# Altium PCB Float_Receiver_PCB.PcbDoc
Units mm, origin at the board's own origin, x right, y up, seen from the top; angles counter-clockwise.
Board outline 77 x 42 mm, 2 copper layers (Top Layer, Bottom Layer); 43 components, 31 nets, 178 pads, 57 vias.
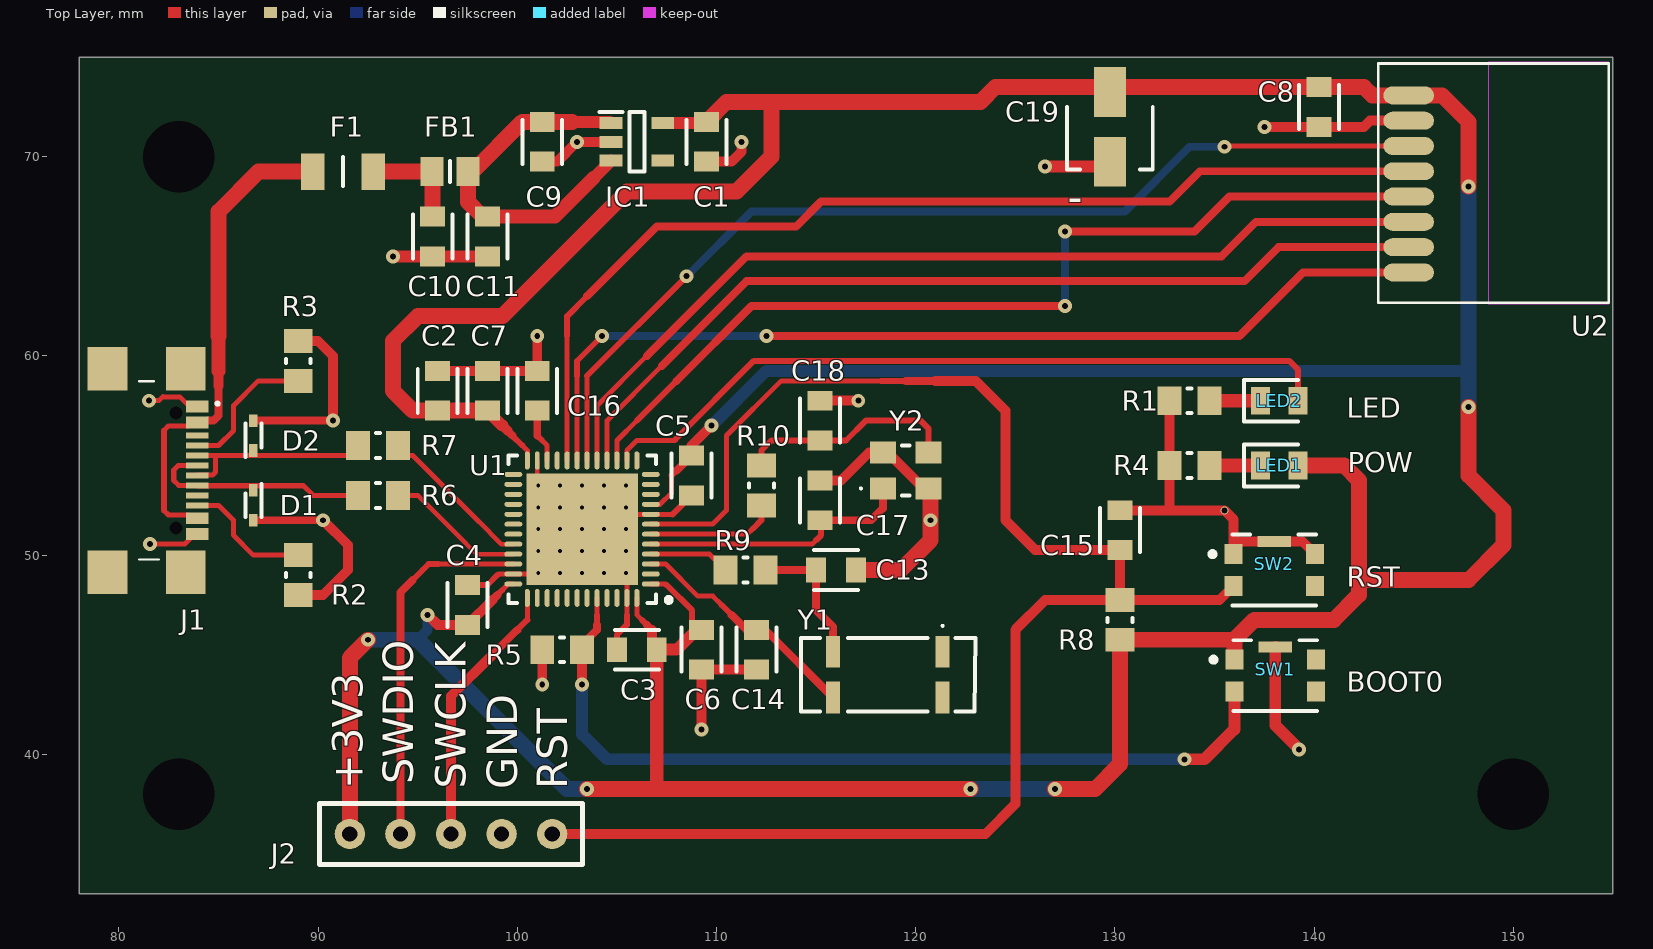
[diagram p0: Top Layer view]
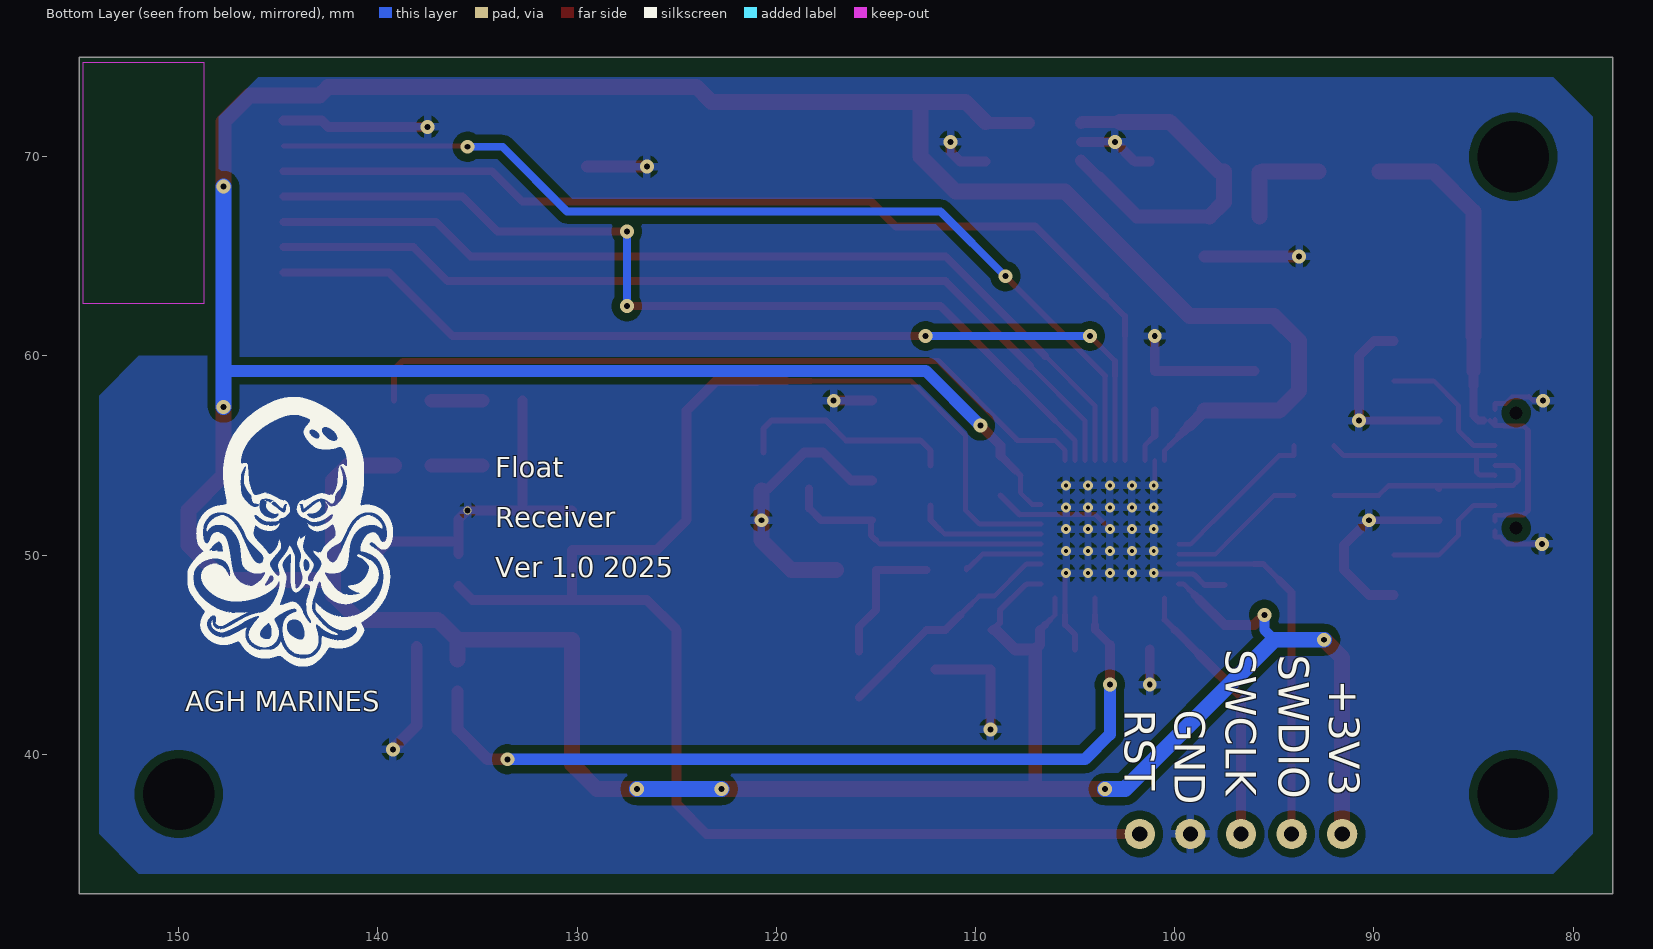
[diagram p1: Bottom Layer view, seen from below]
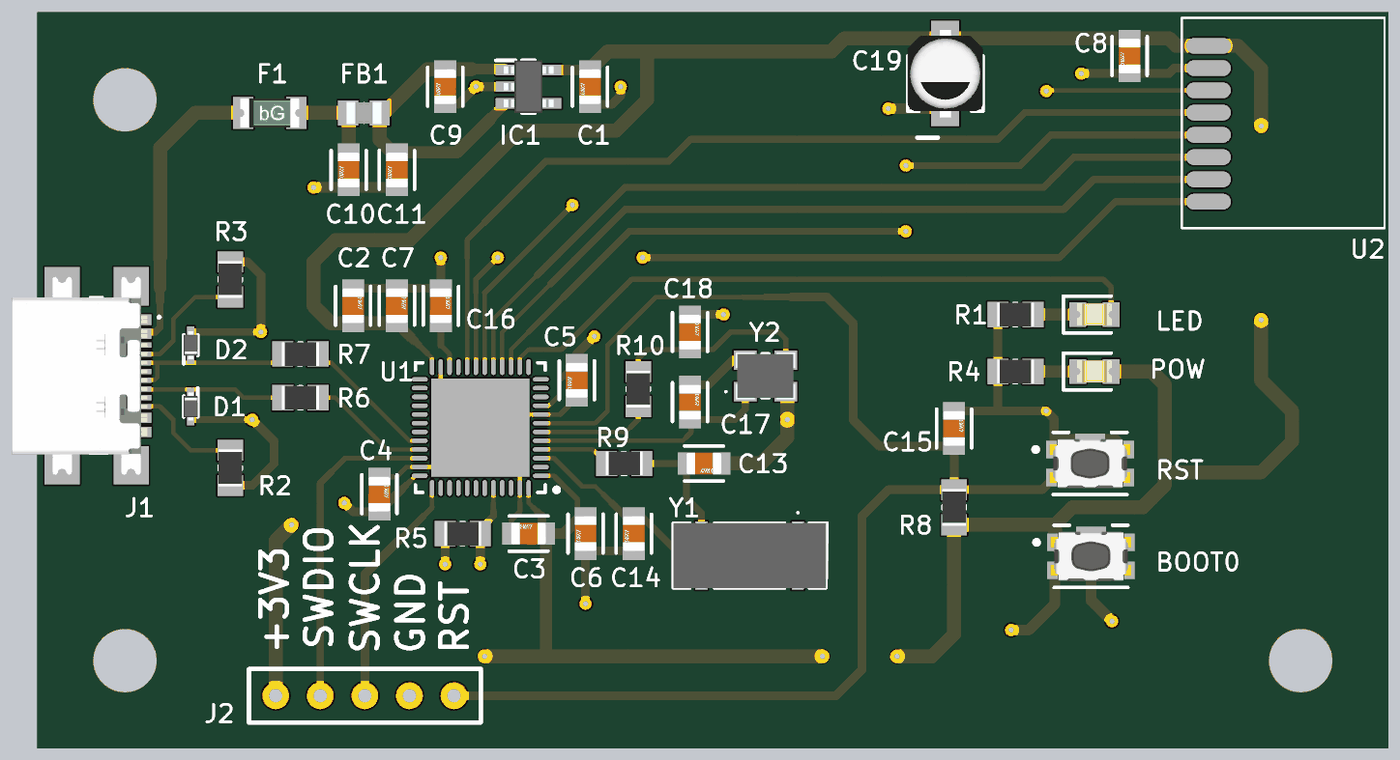
[diagram p2: 3D render of the assembled board from above, using the file's embedded part models]

## Layer stack, top to bottom
Top Solder: solder mask 0.0102, Solder Resist, Dk 3.5
Top Layer: signal copper 0.0356
Dielectric 1: dielectric 0.32, FR-4, Dk 4.8
Bottom Layer: signal copper 0.0356
Bottom Solder: solder mask 0.0102, Solder Resist, Dk 3.5

## Board outline
78,33 78,75 155,75 155,33

## Design rules (kind name [scope] priority, off if disabled: settings)
Clearance [All] p1: gap=0.4 ignorepadtopadclearanceinfootprint=TRUE except(0.203: Arc-Arc Arc-Track Arc-SMDPad Arc-THPad Arc-Via Arc-Text Arc-Hole Track-Track Track-SMDPad Track-THPad Track-Via Track-Text Track-Hole SMDPad-SMDPad SMDPad-THPad SMDPad-Via SMDPad-Text SMDPad-Hole THPad-THPad THPad-Via THPad-Text THPad-Hole Via-Via Via-Text Via-Hole Text-Text Text-Hole)
DiffPairsRouting [All] p1: maxlimit=0.254 minlimit=0.127 mostfreqgap=0.203 toplayer_minwidth=0.229 toplayer_maxwidth=0.381 toplayer_prefwidth=0.254 bottomlayer_minwidth=0.229 bottomlayer_maxwidth=0.381 bottomlayer_prefwidth=0.254 maxuncoupledlength=12.7
HoleSize [All] p1: absolutevalues=TRUE maxlimit=5 minlimit=0.025 maxpercent=80.000 minpercent=20.000
MinimumSolderMaskSliver [All] p1: minsoldermaskwidth=0.01
PlaneClearance [All] p1: clearance=0.4
PlaneConnect [All] p1: planeconnectstyle=Relief reliefexpansion=0.508 reliefentries=4 reliefconductorwidth=0.3 reliefairgap=0.254
PolygonConnect [All] p1: connectstyle=Relief reliefconductorwidth=0.4 reliefentries=4 polygonreliefangle="90 Angle" airgapwidth=0.23
RoutingVias [All] p1: holewidth=0.3 width=0.7 viastyle="Through Hole" minholewidth=0.25 minwidth=0.55 maxholewidth=0.4 maxwidth=0.9
SilkToSilkClearance [All] p1: silktosilkclearance=0.1
SilkToSolderMaskClearance [IsPad] p1: minsilkscreentomaskgap=0.01 clearancetoexposedcopper=TRUE
SolderMaskExpansion [All] p1: expansion=0.102 istentingtop=FALSE
SupplyNets "Schematic Supply Nets_2" [InNet('+5')] p1: voltage=0.000
SupplyNets "Schematic Supply Nets_1" [InNet('GND')] p2: voltage=0.000
SupplyNets "Schematic Supply Nets" [InNet('+3V3')] p3: voltage=0.000
UnRoutedNet [All] p1: checkbadconnections=TRUE
Width [All] p1: maxlimit=1 minlimit=0.2 preferedwidth=0.279 minimp=50.000000 maximp=50.000000 favimp=50.000000
22 further rules are at their usual default settings.

## Classes and differential pairs
differential pair USB_D: +USB_D_P -USB_D_N
differential pair USB: +USB_P -USB_N

## Components (designator, comment, footprint, x,y, rotation, side; value= is the part's Value field where it differs from the comment)
C1 "1u" FP-0805-L_2_01_0_2-W_1_25-MFG 109.5,70.75 r270 top
C2 "100n" FP-0805-L_2_01_0_2-W_1_25-MFG 96,58.25 r90 top
C3 "2.2u" FP-0805-L_2_01_0_2-W_1_25-MFG 106,45.25 r180 top
C4 "100n" FP-0805-L_2_01_0_2-W_1_25-MFG 97.5,47.5 r90 top
C5 "100n" FP-0805-L_2_01_0_2-W_1_25-MFG 108.75,54 r270 top
C6 "100n" FP-0805-L_2_01_0_2-W_1_25-MFG 109.25,45.25 r270 top
C7 "100n" FP-0805-L_2_01_0_2-W_1_25-MFG 98.5,58.25 r90 top
C8 "100n" FP-0805-L_2_01_0_2-W_1_25-MFG 140.25,72.5 r270 top
C9 "1u" FP-0805-L_2_01_0_2-W_1_25-MFG 101.25,70.75 r270 top
C10 "2.2u" FP-0805-L_2_01_0_2-W_1_25-MFG 95.75,66 r270 top
C11 "2.2u" FP-0805-L_2_01_0_2-W_1_25-MFG 98.5,66 r270 top
C13 "15p" FP-0805-L_2_01_0_2-W_1_25-MFG 116,49.25 r0 top
C14 "15p" FP-0805-L_2_01_0_2-W_1_25-MFG 112,45.25 r270 top
C15 "100n" FP-0805-L_2_01_0_2-W_1_25-MFG 130.25,51.25 r90 top
C16 "2.2u" FP-0805-L_2_01_0_2-W_1_25-MFG 101,58.25 r90 top
C17 "8p" FP-0805-L_2_01_0_2-W_1_25-MFG 115.2,52.75 r90 top
C18 "8p" FP-0805-L_2_01_0_2-W_1_25-MFG 115.2,56.75 r90 top
C19 "10uF" EEE1AA220WR 129.75,71.5 r270 top
D1 "ESD5Z5.0T1G" SODFL1608X70N 86.75,52.5 r270 top
D2 "ESD5Z5.0T1G" SODFL1608X70N 86.75,56 r90 top
F1 "500mA" FUSC3216X75N 91.25,69.25 r0 top
FB1 "BLM21PG221SN1D" BEADC2012X105N 96.619,69.25 r0 top
IC1 "AP2112K-3.3TRG1" SOT95P285X140-5N 106,70.75 r0 top
J1 "USB4110-GF-A" USB4110GFA 80.25,54.25 r270 top
J2 "ST-LINK" goldpin5 96.67,36 r0 top
LED1 "RED LED" LEDC2012X80N 138.25,54.5 r0 top
LED2 "GREEN LED" LEDC2012X80N 138.25,57.75 r0 top
R1 "270R" RESC2013X60X35ML10T20 133.75,57.75 r0 top
R2 "5k1" RESC2013X60X35ML10T20 89,49 r90 top
R3 "5k1" RESC2013X60X35ML10T20 89,59.75 r270 top
R4 "330R" RESC2013X60X35ML10T20 133.75,54.5 r0 top
R5 "10k" RESC2013X60X35ML10T20 102.25,45.25 r180 top
R6 "22R" RESC2013X60X35ML10T20 93,53 r180 top
R7 "22R" RESC2013X60X35ML10T20 93,55.5 r180 top
R8 "10k" RESC2013X60X35ML10T20 130.25,46.75 r270 top
R9 "0R" RESC2013X60X35ML10T20 111.45,49.25 r180 top
R10 "0R" RESC2013X60X35ML10T20 112.25,53.5 r90 top
SW1 "KMR221GLFS" FP-KMR221GLFS-MFG 138.05,43.95 r0 top
SW2 "KMR221GLFS" FP-KMR221GLFS-MFG 138,49.25 r0 top
U1 "STM32F401CCU6" STM-UFQFPN48_N 103.25,51.3 r180 top
U2 "NRF24L01+ SMD" PCBComponent_1 145.004,73.918 r270 top
Y1 "LFXTAL003000REEL" LFXTAL003000REEL 118.6,44 r180 top
Y2 "3225-25M-SR" 322525MSR 119.5,54.25 r0 top

## Footprints (in the part's own frame and the unit in brackets; to place one, negate y for a bottom-side part, rotate by r counter-clockwise, add the part's x,y. Pads: shape width x height; smd on the part's side, far side on the other; paste and mask are expansions set on the pad)
322525MSR [mm]
  rect 1.3x1.1 smd: 1(-1.15,-0.9) 2(1.15,-0.9) 3(1.15,0.9) 4(-1.15,0.9)
  silkscreen extent -2.3,-1.25 0.2,1.25, body extent -1.69,-1.34 1.69,1.34, height 0.8
BEADC2012X105N [mm]
  rect 1.15x1.45 smd: 1(-0.9,0) 2(0.9,0)
  silkscreen extent 0,-0.53 0,0.53, body extent -1,-0.63 1,0.63, height 1.05
EEE1AA220WR [mm]
  rect 2.5x1.6 smd: 1(-1.75,0) 2(1.75,0)
  silkscreen extent -1,-2.15 2.15,2.15, body extent -2.5,-2.15 2.5,2.15, height 5.78
FP-0805-L_2_01_0_2-W_1_25-MFG [mm]
  rect 1x1.25 smd paste+0 mask+0: 1(-1,0) 2(1,0)
  silkscreen extent -1.1,-1 1.1,1, body extent -1.6,-0.82 1.6,0.82, height 0.25
FP-KMR221GLFS-MFG [mm]
  rect 0.9x1 smd paste+0 mask+0: 1(-2.05,0.8) 2(2.05,0.8) 3(-2.05,-0.8) 4(2.05,-0.8)
  rect 1.7x0.55 smd paste+0 mask+0: 5(0,1.425)
  silkscreen extent -3.22,-1.78 2.1,1.78, body extent -2.6,-1.5 2.6,1.8, height 0.25
FUSC3216X75N [mm]
  rect 1.17x1.82 smd: 1(-1.52,0) 2(1.52,0)
  silkscreen extent 0,-0.72 0,0.72, body extent -1.68,-0.82 1.68,0.82, height 0.6
goldpin5 [mil]
  round 60 hole 30: 1(-200,0) 2(-100,0) 3(0,0) 4(100,0) 5(200,0)
  silkscreen extent -260,-60 260,60
LEDC2012X80N [mm]
  rect 0.95x1.4 smd: 1(-0.95,0) 2(0.95,0)
  silkscreen extent -1.78,-1.05 0.95,1.05, body extent -1,-0.63 1,0.63, height 0.8
LFXTAL003000REEL [mm]
  rect 0.7x1.6 smd: 1(-2.75,-1.15) 2(2.75,-1.15) 3(2.75,1.15) 4(-2.75,1.15)
  silkscreen extent -4.4,-2.5 4.35,1.85, body extent -4.35,-1.88 4.35,1.88, height 2.6
PCBComponent_1 [mm]
  oval 0.9x2.54 smd: 1(0.838,-0.254) 2(2.108,-0.254) 3(3.378,-0.254) 4(4.648,-0.254) 5(5.918,-0.254) 6(7.188,-0.254) 7(8.458,-0.254) 8(9.728,-0.254)
  Keep-Out Layer region: -0.832,3.746 11.303,3.746 11.303,9.779 -0.832,9.779
  silkscreen extent -0.76,-1.78 11.24,9.78
RESC2013X60X35ML10T20 [mm] "Chip Resistor, 2-Leads, Body 2.1x1.35mm, IPC Low Density"
  rect 1.2x1.45 smd: 1(-1,0) 2(1,0)
  silkscreen extent -0.1,-0.63 0.1,0.63, body extent -1.05,-0.68 1.05,0.67, height 0.6
SODFL1608X70N [mm]
  rect 0.64x0.42 smd: 1(-0.75,0) 2(0.75,0)
  silkscreen extent -1.07,-0.4 0.6,0.4, body extent -0.8,-0.4 0.8,0.4, height 0.7
SOT95P285X140-5N [mm]
  rect 1.15x0.6 smd: 1(-1.3,0.95) 2(-1.3,0) 3(-1.3,-0.95) 4(1.3,-0.95) 5(1.3,0.95)
  silkscreen extent -1.88,-1.5 0.38,1.5, body extent -1.43,-1.5 1.43,1.5, height 1.4
STM-UFQFPN48_N [mm] "QFN, 48-Leads, Body 7.1x7.1mm, Pitch 0.5mm, Thermal Pad 5.6x5.6mm, IPC Medium Density"
  oval 0.9x0.25 smd: 1(-3.45,2.75) 2(-3.45,2.25) 3(-3.45,1.75) 4(-3.45,1.25) 5(-3.45,0.75) 6(-3.45,0.25) 7(-3.45,-0.25) 8(-3.45,-0.75) 9(-3.45,-1.25) 10(-3.45,-1.75) 11(-3.45,-2.25) 12(-3.45,-2.75) 25(3.45,-2.75) 26(3.45,-2.25) 27(3.45,-1.75) 28(3.45,-1.25) 29(3.45,-0.75) 30(3.45,-0.25) 31(3.45,0.25) 32(3.45,0.75) 33(3.45,1.25) 34(3.45,1.75) 35(3.45,2.25) 36(3.45,2.75)
  oval 0.25x0.9 smd: 13(-2.75,-3.45) 14(-2.25,-3.45) 15(-1.75,-3.45) 16(-1.25,-3.45) 17(-0.75,-3.45) 18(-0.25,-3.45) 19(0.25,-3.45) 20(0.75,-3.45) 21(1.25,-3.45) 22(1.75,-3.45) 23(2.25,-3.45) 24(2.75,-3.45) 37(2.75,3.45) 38(2.25,3.45) 39(1.75,3.45) 40(1.25,3.45) 41(0.75,3.45) 42(0.25,3.45) 43(-0.25,3.45) 44(-0.75,3.45) 45(-1.25,3.45) 46(-1.75,3.45) 47(-2.25,3.45) 48(-2.75,3.45)
  rect 5.6x5.6 smd: 49(0,0)
  silkscreen extent -4.48,-3.7 3.7,3.7, body extent -3.55,-3.55 3.55,3.55, height 0.6
USB4110GFA [mm]
  rect 0.3x1.15 smd: A1(-3.35,3.678) A4(-2.55,3.678) A5(-1.25,3.678) A6(-0.25,3.678) A7(0.25,3.678) A8(1.25,3.678) A9(2.55,3.678) A12(3.35,3.678) B1(3.05,3.678) B4(2.25,3.678) B5(1.75,3.678) B6(0.75,3.678) B7(-0.75,3.678) B8(-1.75,3.678) B9(-2.25,3.678) B12(-3.05,3.678)
  round 0.325 hole 0.65 unplated: MH1(-2.89,2.603) MH2(2.89,2.603)
  rect 2.18x2 smd: MP1(-5.11,-0.827) MP2(5.11,-0.827) MP3(-5.11,3.103) MP4(5.11,3.103)
  silkscreen extent -4.5,0.75 4.47,4.75, body extent -5.65,-3.68 5.65,4.02, height 3.26

## Part data
C1 C9 C13 C14 C16 C17 C18: library part CMP-1036-04738-3, Capacitance=100n, Case Code (Imperial)=0805, Case Code (Metric)=2012, Dielectric=X7R, Insulation Resistance=100GR, Max Operating Temperature=125°C, Min Operating Temperature=-55°C, Package Quantity=1, Tolerance=10%, Voltage=10V, Case/Package=0805, Construction=Flat, Contact Plating=Tin, Depth=1.25mm, Dissipation Factor=5%, Height=1.4mm, Lead Free="Lead Free", Length=2.01mm, Mount="Surface Mount", Number of Pins=2, Packaging="Tape and Reel", Radiation Hardening=No, REACH SVHC="No SVHC", RoHS Compliant=Yes, Series=-, Size=1.4mm, Termination=SMD/SMT, Thickness=0.055inch, Voltage Rating=10V, Voltage Rating (DC)=10V, Width=1.25mm
C2 C3 C4 C5 C6 C7 C8 C10 C11 C15: library part CMP-1036-04738-3, Case Code (Imperial)=0805, Case Code (Metric)=2012, Dielectric=X7R, Insulation Resistance=100GR, Max Operating Temperature=125°C, Min Operating Temperature=-55°C, Package Quantity=1, Tolerance=10%, Voltage=10V, Case/Package=0805, Construction=Flat, Contact Plating=Tin, Depth=1.25mm, Dissipation Factor=5%, Height=1.4mm, Lead Free="Lead Free", Length=2.01mm, Mount="Surface Mount", Number of Pins=2, Packaging="Tape and Reel", Radiation Hardening=No, REACH SVHC="No SVHC", RoHS Compliant=Yes, Series=-, Size=1.4mm, Termination=SMD/SMT, Thickness=0.055inch, Voltage Rating=10V, Voltage Rating (DC)=10V, Width=1.25mm
  C2 C4 C5 C6 C7 C8 C15: Capacitance=100n
  C3 C10 C11: Capacitance=2.2u
C19: library part EEE1CA100SR, "Capacitor Polarised", Manufacturer_Name=Panasonic, Arrow Part Number=EEE1CA100SR, Arrow Price/Stock=https://www.arrow.com/en/products/eee-1ca100sr/panasonic, Datasheet Link=http://industrial.panasonic.com/cdbs/www-data/pdf/RDE0000/ABA0000C1145.pdf, Height=5.5mm, Manufacturer_Part_Number=EEE1CA100SR
D1 D2: "Diode", Manufacturer_Name=onsemi, Mouser Part Number=863-ESD5Z5.0T1G, Arrow Part Number=ESD5Z5.0T1G, Arrow Price/Stock=https://www.arrow.com/en/products/esd5z5.0t1g/on-semiconductor?utm_currency=USD&region=nac, Datasheet Link=https://www.onsemi.com/pub/Collateral/ESD5Z2.5T1-D.PDF, Height=0.7mm, Manufacturer_Part_Number=ESD5Z5.0T1G, Mouser Price/Stock=https://www.mouser.co.uk/ProductDetail/onsemi/ESD5Z5.0T1G?qs=OSf9jACorvYw3fDx1S8P6A%3D%3D
F1: library part 0ZCJ0025FF2E, "Fuse", Manufacturer_Name="Bel Circuit Protection", Arrow Part Number=0ZCJ0025FF2E, Arrow Price/Stock=https://www.arrow.com/en/products/0zcj0025ff2e/bel-group?region=nac, Datasheet Link=https://componentsearchengine.com/Datasheets/2/0ZCJ0025FF2E.pdf, Height=0.75mm, Manufacturer_Part_Number=0ZCJ0025FF2E
FB1: "Ferrite Bead", Manufacturer_Name="Murata Electronics", Mouser Part Number=81-BLM21P221SG, Arrow Part Number=BLM21PG221SN1D, Arrow Price/Stock=https://www.arrow.com/en/products/blm21pg221sn1d/murata-manufacturing?utm_currency=USD&region=europe, Datasheet Link=https://datasheet.datasheetarchive.com/originals/dk/DKDS-31/605570.pdf, Height=1.05mm, Manufacturer_Part_Number=BLM21PG221SN1D, Mouser Price/Stock=https://www.mouser.co.uk/ProductDetail/Murata-Electronics/BLM21PG221SN1D?qs=N%2FLoXOA9PTJ4i6RHFrsqmw%3D%3D
IC1: "Integrated Circuit", Manufacturer_Name="Diodes Incorporated", Mouser Part Number=621-AP2112K-3.3TRG1, Arrow Part Number=AP2112K-3.3TRG1, Arrow Price/Stock=https://www.arrow.com/en/products/ap2112k-3.3trg1/diodes-incorporated?utm_currency=USD&region=nac, Datasheet Link=https://www.diodes.com//assets/Datasheets/AP2112.pdf, Height=1.4mm, Manufacturer_Part_Number=AP2112K-3.3TRG1, Mouser Price/Stock=https://www.mouser.co.uk/ProductDetail/Diodes-Incorporated/AP2112K-3.3TRG1?qs=x6A8l6qLYDDPYHosCdzh%2FA%3D%3D
J1: "Connector", Manufacturer_Name="GCT (GLOBAL CONNECTOR TECHNOLOGY)", Mouser Part Number=640-USB4110-GF-A, Datasheet Link=https://gct.co/files/drawings/usb4110.pdf, Height=3.26mm, Manufacturer_Part_Number=USB4110-GF-A, Mouser Price/Stock=https://www.mouser.co.uk/ProductDetail/GCT/USB4110-GF-A?qs=KUoIvG%2F9IlYiZvIXQjyJeA%3D%3D
J2: library part goldpin_5
LED1 LED2: library part HSMG-C170, "LED", Manufacturer_Name="Avago Technologies", Mouser Part Number=630-HSMG-C170, Datasheet Link=https://datasheet.datasheetarchive.com/originals/distributors/SFDatasheet-4/sf-00083853.pdf, Height=0.8mm, Manufacturer_Part_Number=HSMG-C170, Mouser Price/Stock=https://www.mouser.co.uk/ProductDetail/Broadcom-Avago/HSMG-C170?qs=YDL0qNrpDT4lm8ArMPkMEA%3D%3D
R1 R2 R3 R4 R5 R6 R7 R8 R9 R10: library part CMP-2100-03671-1, Case Code (Imperial)=0805, Case Code (Metric)=2012, Manufacturer=Yageo, Max Operating Temperature=155degC, Max Power Dissipation=125mW, Min Operating Temperature=-55degC, Package Description="2-Pin Surface Mounted Device, Body 2 x 1.25 mm", Package Quantity=1, Resistance=1KOhm, Temperature Coefficient=100ppm/degreesC, Tolerance=1%, Voltage Rating=150V, Case/Package=0805, Composition=ThickFilm, Datasheet URL=http://www.yageo.com/NewPortal/yageodocoutput?fileName=/pdf/R-Chip/PYu-RC_Group_51_RoHS_L_5.pdf, Datasheet Version="Rev. 5, 10/2016", Depth=1.25mm, Height=0.024inch, Lead Free=LeadFree, Length=0.079inch, Manufacturer URL=http://www.yageo.com/, Military Standard=Not, Number of Pins=2, Number of Terminations=2, Package Reference=0805, Packaging=TapeandReel, Power Rating=125mW, REACH SVHC=Unknown, RoHSCompliant=true, Termination=SMD/SMT, Voltage Rating (DC)=150V, Width=0.049inch
SW1 SW2: library part CMP-10040-000018-1, "SWITCH TACTILE SPST-NO 0.05A 32V", Case/Package=SMD/SMT, Contact Current Rating=50mA, Contact Resistance=100mR, Max Operating Temperature=85°C, Max Voltage Rating (DC)=32V, Min Operating Temperature=-40°C, Operating Force=2N, Package Quantity=1, Power Rating=1W, Actuator Length=0.5mm, Actuator Type=Standard, Contact Material=Silver, Contact Plating=Silver, Current Rating=50mA, Depth=4.6mm, Illumination Type=Non-Illuminated, Lead Free="Lead Free", Length=2.8mm, Max Current Rating=50mA, Mechanical Life=200000Cycles, Mount="Surface Mount", Orientation=Straight, Packaging="Tape and Reel", Radiation Hardening=No, REACH SVHC="No SVHC", Switch Function=Off-Mom, Switch Travel=0.25mm, Termination="Gull Wing", Throw Configuration=SPST, Voltage Rating (DC)=32V, Width=2.8mm
U1: library part CMP-0243-00119-2, "ARM Cortex-M4 32-bit MCU+FPU, 105 DMIPS, 256 kB Flash, 64 kB Internal RAM, 36 I/Os, 48-pin UFQFPN, -40 to 85 degC, Tray", I/Os (High Current)=36, Manufacturer=STMicroelectronics, Operating Frequency(F) (Processor speed) (MHz)=84, Supply Voltage(Vcc) max (V)=3.6, Supply Voltage(Vcc) min (V)=1.8, ComponentLink1Description="Manufacturer URL", ComponentLink1URL=http://www.st.com/web/en/home.html, ComponentLink2Description=Datasheet, ComponentLink2URL=http://www.st.com/st-web-ui/static/active/en/resource/technical/document/data_brief/DM00071938.pdf, ComponentLink3Description="Package Specification", ComponentLink3URL=http://www.st.com/st-web-ui/static/active/en/resource/technical/document/data_brief/DM00071938.pdf, Core="ARM Cortex-M4", DatasheetVersion="Rev. 1", FLASH Size (Prog) (kB)=256, Internal RAM Size (kB)=64, Mounting Technology="Surface Mount", PackageDescription="48-Pin Ultra Thin Fine Pitch Quad Flat No-Lead, 7 x 7 x 0.6 mm Body, 0.5 mm Pitch, Exposed Pad", PackageReference=UFQFPN48, PackageVersion="Rev. 1, 04/2013", Packing=Tray, PartNumber=STM32F401CCU6
Y1: "Crystal or Oscillator", Manufacturer_Name=IQD, Mouser Part Number=449-LFXTAL003000REEL, Arrow Part Number=LFXTAL003000REEL, Arrow Price/Stock=https://www.arrow.com/en/products/lfxtal003000reel/iqd-frequency-products?region=europe, Datasheet Link=https://www.iqdfrequencyproducts.com/products/pn/LFXTAL003000.pdf, Height=2.5mm, Manufacturer_Part_Number=LFXTAL003000REEL, Mouser Price/Stock=https://www.mouser.co.uk/ProductDetail/IQD/LFXTAL003000Reel?qs=GJ%2F2ZGcr5uOHwN9t8Hha8Q%3D%3D
Y2: "Crystal or Oscillator", Manufacturer_Name=SRPASSIVES, Datasheet Link=https://www.tme.eu/Document/9cb2d0edad968d8543e7bc99995fd180/3235.pdf, Height=0.7mm, Manufacturer_Part_Number=3225-25M-SR

## Free pads (board coordinates)
  round 1.524 hole 3.6: ""(83,38) ""(83,70) ""(150,38)

## Via types
v1: diameter 0.7, hole 0.3, Top Layer to Bottom Layer, 31 vias
v2: diameter 0.5, hole 0.2, Top Layer to Bottom Layer, 25 vias
v3: diameter 0.4, hole 0.3, Top Layer to Bottom Layer, 1 vias

## Nets (pads, with @x,y where several pads share a name; then routed paths per layer and width w, separated by ;. In a path a pad name is that pad's centre, name@x,y a point inside that pad or via, vN(x,y) a via of type N, cw(c..) or ccw(c..) an arc to the next point about the centre after c; other vN are vias at no path point)
+3V3: C1.1 C2.1 C3.1 C4.1 C5.1 C6.1 C7.1 C8.1 C19.1 IC1.5 J2.1 LED1.2 R8.2 SW1.1 U1.1 U1.9 U1.24 U1.36 U1.48 U2.1 | length 256.9
  Top Layer w0.25: 99.25,48.25 99.55,48.55 U1.36 ; U1.48 106,47 106.25,46.75 ; U1.1 107.45,48.55 107.5,48.5 ; U1.9 107.166,52.55 107.75,53.134 107.75,54
  Top Layer w0.254: 100.25,55.5 100.5,55.25 U1.24
  Top Layer w0.3: 99,48 99.25,48.25 ; 99.75,56 100.25,55.5 ; 106.25,46.75 106.5,46.5 ; 107.5,48.5 108.775,47.225 108.775,46.6 109.125,46.25 C6.1 ; 107.75,54 108,54.25
  Top Layer w0.4: 98.75,47.75 99,48 ; 99.5,56.25 99.75,56 ; 106.5,46.5 106.75,46.25 ; 108,54.25 C5.1
  Top Layer w0.5: v1(95.5,47) 96,46.5 C4.1 98.75,47.75 ; 99.25,56.5 99.5,56.25 ; 106.75,46.25 106.75,45.5 C3.1 ; C5.1 108.75,55.5 v1(109.75,56.5) ; C6.1@109,46.25 C6.1@109.125,46.25
  Top Layer w0.6: C7.1 99.25,56.5 ; C3.1 108,45.25 C6.1@109,46.25 ; IC1.5 109.45,71.7 C1.1
  Top Layer w0.7: 107,38.25 C3.1
  Top Layer w0.8: J2.1 91.59,44.84 v1(92.5,45.75) ; C7.1 C2.1 94.75,57.25 93.75,58.25 93.75,60.75 95,62 99.25,62 105.5,68.25 111,68.25 112.75,70 112.75,72.67 ; v1(103.5,38.25) 107,38.25 v1(122.75,38.25) ; C1.1 110.5,72.75 112.75,72.75 123.25,72.75 ; 123.307,72.807 124,73.5 129.75,73.5 C8.1 142.5,73.5 142.92,73.08 U2.1 146.42,73.08 147.75,71.75 v1(147.75,68.5) ; v1(127,38.25) 129,38.25 130.25,39.5 R8.2 136,45.75 ; SW1.1 136,45.75 ; LED1.2 141.5,54.5 142.25,53.75 142.25,48.75 ; v1(147.75,57.443) 147.75,54 149.5,52.25 149.5,50.5 147.75,48.75 142.25,48.75 ; 136,45.75 137,46.75 141,46.75 142.25,48 142.25,48.75
  Bottom Layer w0.5: 95,45.75 95.5,46.25 v1(95.5,47)
  Bottom Layer w0.6: v1(109.75,56.5) 112.5,59.25 147.75,59.25
  Bottom Layer w0.8: v1(92.5,45.75) 95,45.75 102.5,38.25 v1(103.5,38.25) ; v1(122.75,38.25) v1(127,38.25) ; v1(147.75,57.443) 147.75,59.25 v1(147.75,68.5)
+5: C9.1 C11.1 FB1.2 IC1.1 IC1.3 | length 18.5
  Top Layer w0.5: FB1.2@97.4,69.25 FB1.2 FB1.2@97.75,69.25 ; C11.1@98.25,67 C11.1
  Top Layer w0.6: 102.75,71.75 104.65,71.75 IC1.1 ; 103.825,68.925 IC1.3
  Top Layer w0.7: C11.1 101.9,67 103.825,68.925
  Top Layer w0.8: FB1.2 97.519,67.731 C11.1@98.25,67 ; FB1.2@97.75,69.25 100.25,71.75 C9.1 102.75,71.75
BOOT0: R5.1 SW1.3 U1.44 | length 42.9
  Top Layer w0.25: 104,47 U1.44
  Top Layer w0.3: 104,46.5 104,47
  Top Layer w0.4: R5.1@103.25,45.5 104,46.25 104,46.5
  Top Layer w0.5: v1(103.25,43.5) R5.1@103.25,45.5
  Top Layer w0.6: v1(133.5,39.75) 134.5,39.75 136,41.25 SW1.3
  Bottom Layer w0.6: v1(103.25,43.5) 103.25,41 104.5,39.75 v1(133.5,39.75)
CC1: J1.A5 R3.2 | length 7.2
  Top Layer w0.25: J1.A5 85,55.5 85.75,56.25 85.75,57.5 87,58.75 R3.2
CC2: J1.B5 R2.2 | length 6.5
  Top Layer w0.25: J1.B5 85,52.5 85.75,51.75 85.75,51 86.75,50 R2.2
Crystal32_OUT: C13.1 R9.1 Y1.2 | length 7
  Top Layer w0.4: R9.1 C13.1 115,47.25 115.85,46.4 Y1.2
Crystal_OUT: C18.1 R10.2 Y2.3 | length 11.1
  Top Layer w0.3: R10.2 112.25,55.25 112.75,55.75 C18.1 116.5,55.75 117.5,56.75 120.25,56.75 120.65,56.35 Y2.3
GND: C1.2 C2.2 C3.2 C4.2 C5.2 C6.2 C7.2 C8.2 C9.2 C10.2 C11.2 C13.2 C14.2 C15.2 C16.2 C17.2 C18.2 C19.2 D1.2 D2.2 IC1.2 J1.A1 J1.A12 J1.B1 J1.B12 J2.4 R1.1 R2.1 R3.1 R4.1 R5.2 SW1.5 SW2.1 SW2.2 SW2.5 U1.8 U1.23 U1.35 U1.47 U1.49 U2.2 Y2.2 Y2.4 | length 114.5
  Top Layer w0.25: v1(81.5,57.75) 82,57.75 82.204,57.954 82.217,57.942 83.058,57.942 83.4,57.6 J1.A1 J1.B12 ; v1(81.558,50.558) 83.308,50.558 83.65,50.9 J1.A12 J1.B1 ; 99,49 99.05,49.05 U1.35 101,49.05 v2(101.05,49.1) ; U1.49@101,53.55 U1.23 ; v2(103.25,51.3) 104,52.05 U1.8 107.8,52.05 ; v2(105.45,49.1) 105.5,49.05 U1.47 105.5,47.003 105.497,47
  Top Layer w0.3: C4.2 98.5,48.5 99,49 ; C3.2 105,46 105.497,46.497 105.497,47 ; 107.8,52.05 C5.2
  Top Layer w0.4: D1.2 v1(90.25,51.75) ; D2.2 v1(90.75,56.75)
  Top Layer w0.5: R2.1 90.25,48 91.5,49.25 91.5,50.5 v1(90.25,51.75) ; R3.1 90,60.75 90.75,60 v1(90.75,56.75) ; C2.2 C7.2 C16.2 v1(101,61) ; v1(101.25,43.5) R5.2 ; C9.2 102,69.75 v1(103,70.75) IC1.2 ; v1(109.25,41.25) C6.2 C14.2 ; C1.2 110.75,69.75 111.25,70.25 v1(111.25,70.75) ; C17.2 116.25,53.75 117.5,55 117.65,55.15 Y2.4 118.6,55.15 120.4,53.35 Y2.2 Y2.2@120.75,53.25 ; C18.2 v1(117.116,57.75) ; C15.2 132.75,52.25 ; R1.1 R4.1 132.75,52.25 ; SW2.1 135.95,50.55 ; v1(137.5,71.5) C8.2 142.5,71.5 142.81,71.81 U2.2 ; SW2.2 139.425,50.675 SW2.5 136.075,50.675 135.95,50.55 ; 132.75,52.25 v3(135.5,52.25) 135.95,51.8 135.95,50.55
  Top Layer w0.6: v1(93.75,65) C10.2 C11.2 ; v1(126.5,69.5) C19.2@129.5,69.5 ; SW1.5 138.05,41.45 v1(139.25,40.25)
  Top Layer w0.8: C13.2 119.25,49.25 120.75,50.75 v1(120.75,51.75) Y2.2@120.75,53.25
  other v2: 102.15,49.1 103.25,49.1 104.35,49.1 101.05,50.2 102.15,50.2 103.25,50.2 104.35,50.2 105.45,50.2 101.05,51.3 102.15,51.3 104.35,51.3 105.45,51.3 101.05,52.4 102.15,52.4 103.25,52.4 104.35,52.4 105.45,52.4 101.05,53.5 102.15,53.5 103.25,53.5 104.35,53.5 105.45,53.5
LED: LED2.2 U1.14 | length 37.8
  Top Layer w0.25: U1.14 105.5,55.25 106,55.75 107.911,55.75 107.938,55.777 107.938,55.812
  Top Layer w0.3: 107.938,55.812 111.876,59.75 138.75,59.75 139.2,59.3 LED2.2
LED1_R: LED1.1 R4.2 | length 2.5
  Top Layer w0.7: R4.2 LED1.1
LED2_R: LED2.1 R1.2 | length 2.5
  Top Layer w0.7: R1.2 LED2.1
NRF_CE: U1.18 U2.3 | length 50.3
  Top Layer w0.25: U1.18 103.5,59 ; v1(135.5,70.5) 135.54,70.54 U2.3
  Top Layer w0.3: 103.5,59 v1(108.5,64)
  Bottom Layer w0.4: v1(108.5,64) 111.75,67.25 130.5,67.25 133.75,70.5 v1(135.5,70.5)
NRF_CSN: U1.20 U2.4 | length 52.5
  Top Layer w0.25: U1.20 102.5,61
  Top Layer w0.3: 102.5,61 102.5,62 103.5,63
  Top Layer w0.4: 103.5,63 107,66.5 114,66.5 115.25,67.75 132.75,67.75 134.27,69.27 U2.4
NRF_IRQ: U1.19 U2.8 | length 48.6
  Top Layer w0.25: 102.997,59 103,58.997 U1.19
  Top Layer w0.3: 102.997,59 102.997,59.747 v1(104.25,61)
  Top Layer w0.4: v1(112.5,61) 136.25,61 139.44,64.19 U2.8
  Bottom Layer w0.4: v1(104.25,61) v1(112.5,61)
NRF_MISO: U1.16 U2.7 | length 45.9
  Top Layer w0.25: U1.16 104.5,56.75 107.25,59.5
  Top Layer w0.4: 107.25,59.5 111.5,63.75 136.5,63.75 138.21,65.46 U2.7
NRF_MOSI: U1.17 U2.6 | length 47.3
  Top Layer w0.25: U1.17 104,57.5 106.5,60
  Top Layer w0.4: 106.5,60 111.5,65 135.348,65 137.078,66.73 U2.6
NRF_SCK: U1.15 U2.5 | length 48
  Top Layer w0.25: U1.15 105,55.75 106,56.75
  Top Layer w0.3: 106,56.75 108,58.75
  Top Layer w0.4: 108,58.75 111.75,62.5 v1(127.5,62.5) ; v1(127.5,66.25) 134,66.25 135.75,68 U2.5
  Bottom Layer w0.4: v1(127.5,62.5) v1(127.5,66.25)
NRST: C15.1 J2.5 R8.1 SW2.3 U1.7 | length 82.5
  Top Layer w0.25: U1.7 109.8,51.55 110.5,52.25 110.5,56 113.25,58.75 118.25,58.75
  Top Layer w0.3: 118.25,58.75 119.5,58.75
  Top Layer w0.4: 119.5,58.75 121,58.75
  Top Layer w0.5: J2.5 123.5,36 125,37.5 125,46.25 126.5,47.75 R8.1 ; 121,58.75 123,58.75 124.5,57.25 124.5,51.75 126,50.25 C15.1 R8.1 ; SW2.3 135.25,47.75 131,47.75 R8.1
OSC32_IN: C14.1 U1.3 Y1.3 | length 11.8
  Top Layer w0.25: U1.3 107.45,49.55 109.063,47.937 109.813,47.937 110.25,47.5
  Top Layer w0.3: 110.25,47.5 110.75,47
  Top Layer w0.4: 110.75,47 111.5,46.25 C14.1@111.875,46.25 ; C14.1 112.45,46.25 Y1.3
OSC32_OUT: R9.2 U1.4 | length 4.2
  Top Layer w0.25: U1.4 109.65,50.05 110.325,49.375 110.45,49.375 R9.2
OSC_IN: C17.1 U1.5 Y2.1 | length 13.9
  Top Layer w0.25: U1.5 114.8,50.55 115,50.75
  Top Layer w0.3: 115,50.75 115.25,51 115.25,51.7 C17.1
  Top Layer w0.4: C17.1 117.75,51.75 118.35,52.35 Y2.1
OSC_OUT: R10.1 U1.6 | length 6.6
  Top Layer w0.25: U1.6 111.55,51.05 111.835,51.335
  Top Layer w0.3: 111.835,51.335 112.25,51.75 R10.1
SWCLK: J2.3 U1.37 | length 13.4
  Top Layer w0.25: 100.5,46.75 U1.37
  Top Layer w0.3: 100,46.25 100.5,46.75
  Top Layer w0.4: 98.75,45 100,46.25
  Top Layer w0.5: J2.3 96.67,42.92 98.75,45
SWDIO: J2.2 U1.34 | length 18.4
  Top Layer w0.25: 96.05,49.55 U1.34
  Top Layer w0.3: 94.75,48.75 95.25,49.25 95.55,49.55 96.05,49.55
  Top Layer w0.4: J2.2 94.13,48.13 94.75,48.75
USB_D_N: D2.1 J1.A7 J1.B7 R7.2 | length 10.1
  Top Layer w0.254: J1.A7 83.948,54.02 84.702,54.02 84.851,54.169 84.851,55 ; J1.B7 84.851,55 ; R7.2 92,55.473 91.527,55 86.25,55 86,55 84.851,55
USB_D_P: D1.1 J1.A6 J1.B6 R6.2 | length 11.4
  Top Layer w0.254: J1.A6 82.973,54.5 82.75,54.277 82.75,53.75 83,53.5 J1.B6 83.948,53.48 86,53.48 86.5,53.48 89.27,53.48 89.75,53 R6.2
  Top Layer w0.381: D1.1@86.75,53.36 D1.1@86.769,53.38
USB_N: R7.1 U1.32 | length 8.1
  Top Layer w0.229: 98.058,51.692 99.2,50.55 U1.32
  Top Layer w0.254: R7.1 94,55 94.75,55 98.058,51.692
USB_P: R6.1 U1.33 | length 7
  Top Layer w0.229: 96.96,51.04 97.95,50.05 U1.33
  Top Layer w0.254: R6.1 95,53 96.96,51.04
VBUS: F1.1 J1.A4 J1.A9 J1.B4 J1.B9 | length 24.9
  Top Layer w0.25: 82.25,52.25 82.487,52.013 83.487,52.013 83.5,52 J1.B4 J1.A9 ; 82.25,56.25 82.487,56.487 83.487,56.487 83.5,56.5 J1.B9 ; J1.A4 J1.B9 ; J1.A4@84.178,56.75 J1.B9
  Top Layer w0.3: 82.25,52.25 82.25,56.25
  Top Layer w0.4: J1.A4@84.5,56.747 84.747,56.747 85,57 85,58.5
  Top Layer w0.5: 85,58.5 85,59.25
  Top Layer w0.7: 85,59.25 85,61
  Top Layer w0.8: 85,61 85,67.25 87,69.25 F1.1
VCAP1: C16.1 U1.22 | length 2.7
  Top Layer w0.25: 101.25,55.75 101.5,55.5 U1.22
  Top Layer w0.3: 101,56 101.25,55.75
  Top Layer w0.4: 101,56 C16.1
VIN: C10.1 F1.2 FB1.1 | length 5
  Top Layer w0.8: F1.2 FB1.1@95.6,69.25 ; C10.1 FB1.1@95.75,69.219
pads on no net: IC1.4 J1.A8 J1.B8 J1.MH1 J1.MH2 J1.MP1 J1.MP2 J1.MP3 J1.MP4 SW1.2 SW1.4 SW2.4 U1.2 U1.10 U1.11 U1.12 U1.13 U1.21 U1.25 U1.26 U1.27 U1.28 U1.29 U1.30 U1.31 U1.38 U1.39 U1.40 U1.41 U1.42 U1.43 U1.45 U1.46 Y1.1 Y1.4

## Polygon pours and split planes (outlines as drawn)
GND on Bottom Layer "GND_L02_P000" (solid, pour order 0): 146,74 148,72 148,62 148,60 152,60 154,58 154,36 152,34 81,34 79,36 79,72 81,74

## Silkscreen, mask and mechanical layers (free items; w line width, h text height)
Top Overlay:
  text "-" at 127.631,67.246 h1.52
  text "LED" at 141.65,56.9 h1
  text "POW" at 141.684,54.15 h1
  text "RST" at 141.65,48.4 h1
  text "BOOT0" at 141.65,43.15 h1
  text "SWDIO" at 94.782,38.501 h1.52 r90
  text "+3V3" at 92.246,38.254 h1.52 r90
  text "SWCLK" at 97.411,38.259 h1.52 r90
  text "GND" at 99.996,38.254 h1.52 r90
  text "RST" at 102.496,38.254 h1.52 r90
Bottom Overlay:
  drawing of 4 lines, arcs and shapes, not listed
  text "Float" at 134.1,53.9 h1
  text "Receiver" at 134.1,51.4 h1
  text "Ver 1.0 2025" at 134.1,48.9 h1
  text "SWCLK" at 97.438,45.285 h1.52 r90
  text "SWDIO" at 94.782,44.998 h1.52 r90
  text "+3V3" at 92.246,43.746 h1.52 r90
  text "GND" at 99.996,42.246 h1.52 r90
  text "RST" at 102.496,42.246 h1.52 r90
  text "AGH MARINES" at 149.681,42.15 h1
Mechanical 1:
  the board outline again, w0.254